# Altium PCB Led Strip 8mm.PcbDoc
Units mm, origin at the board's own origin, x right, y up, seen from the top; angles counter-clockwise.
Board outline 300 x 100 mm, 4 copper layers (Top Layer, Internal Plane 1, Internal Plane 2, Bottom Layer), stack 0.462 mm thick; 52 components, 41 nets, 104 pads, 0 vias.
Unrouted connection lines stored in the file: 21.
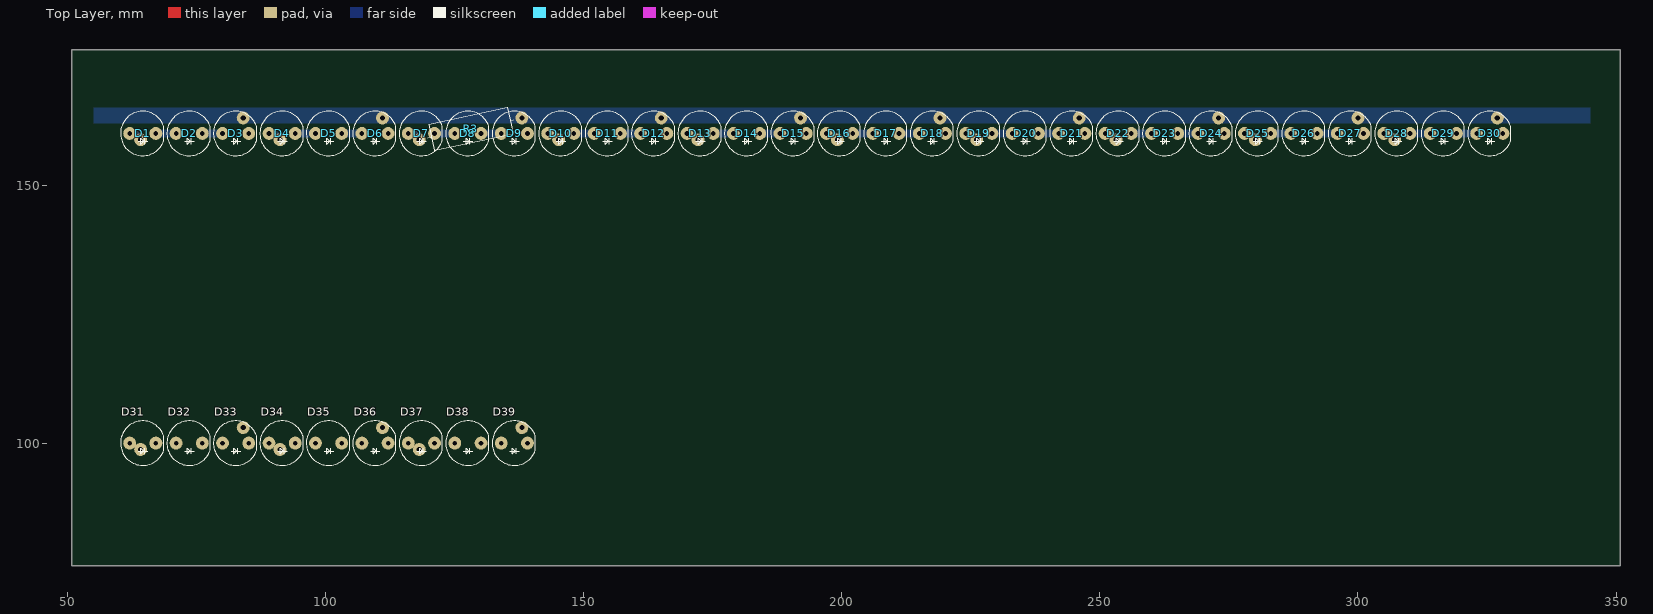
[diagram p0: Top Layer view]
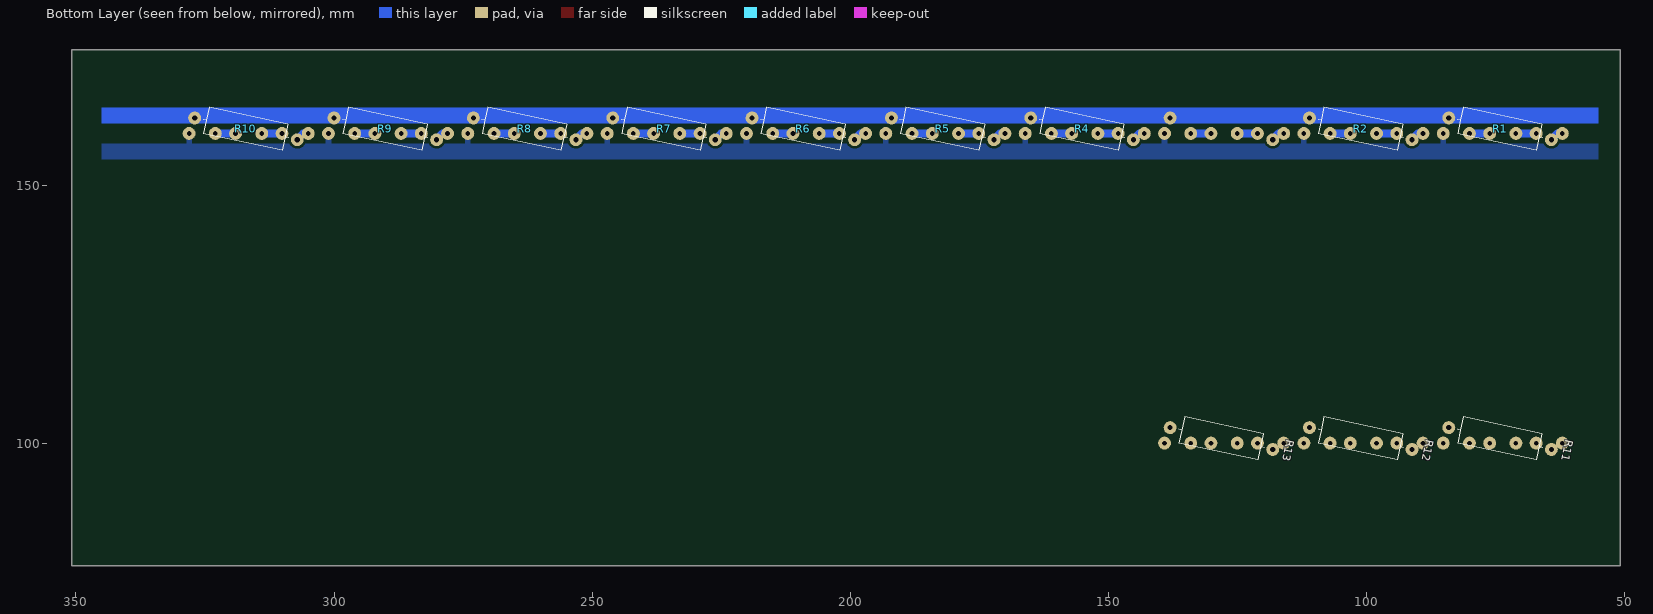
[diagram p1: Bottom Layer view, seen from below]
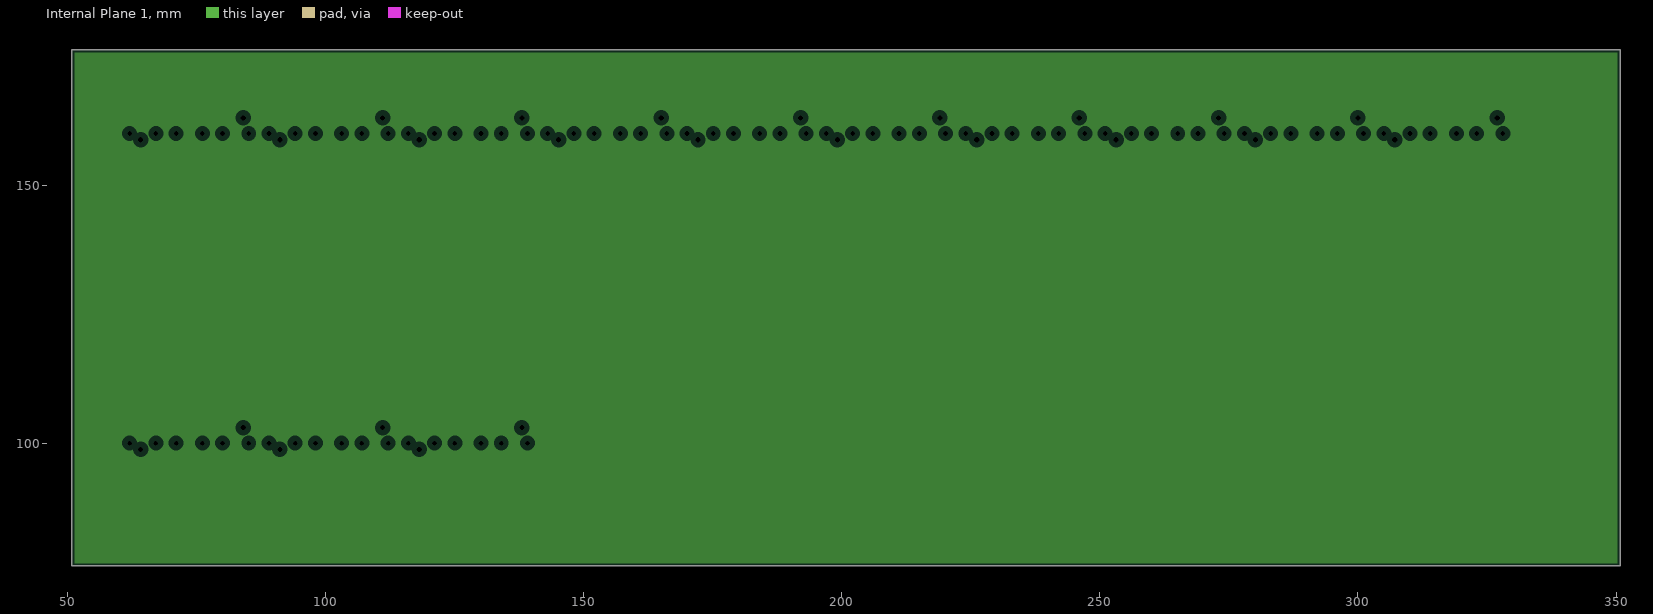
[diagram p2: Internal Plane 1, clearances drawn from the general rule]
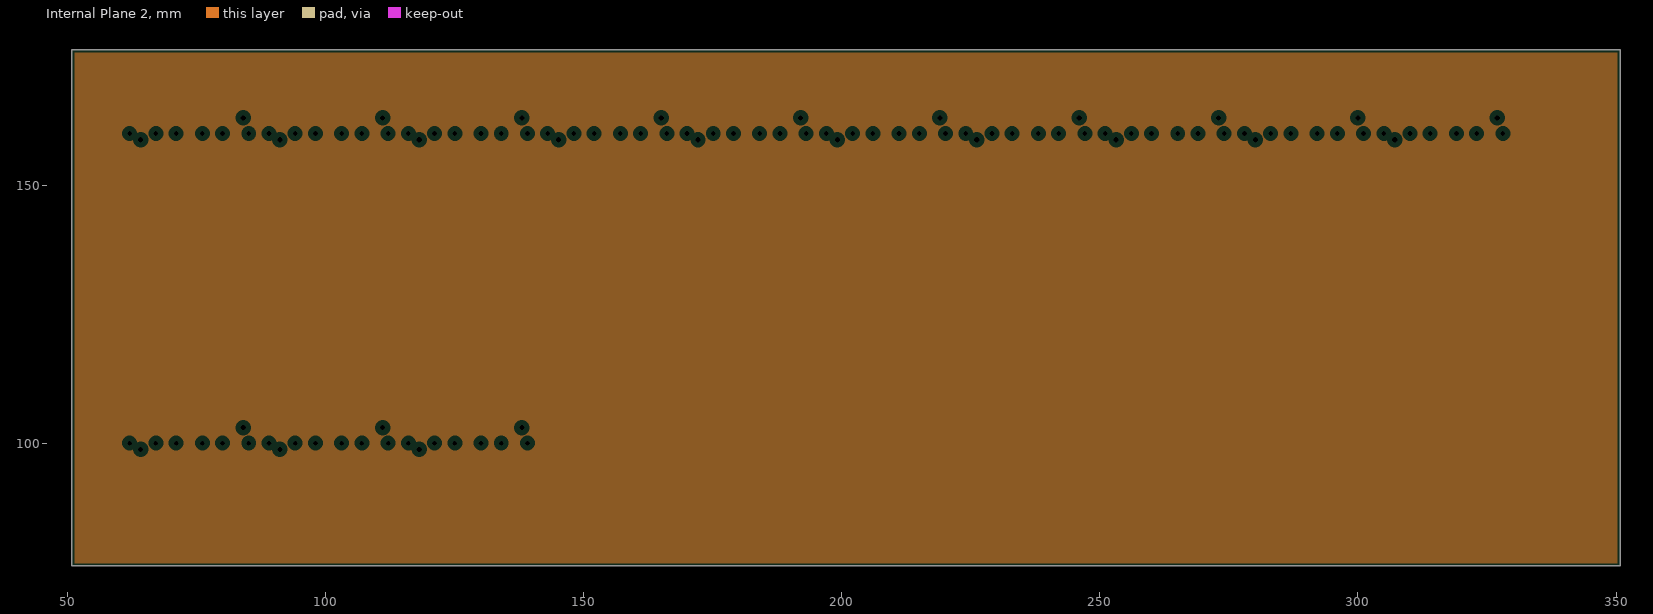
[diagram p3: Internal Plane 2, clearances drawn from the general rule]

## Layer stack, top to bottom
Top Solder: solder mask 0.0102, Solder Resist, Dk 3.5
Top Layer: signal copper 0.0356
Internal Plane 1: plane copper 0.0356
Internal Plane 2: plane copper 0.0356
Dielectric 1: dielectric 0.32, FR-4, Dk 4.8
Bottom Layer: signal copper 0.0356
Bottom Solder: solder mask 0.0102, Solder Resist, Dk 3.5

## Board outline
50.8,76.2 350.8,76.2 350.8,176.2 50.8,176.2

## Design rules (kind name [scope] priority, off if disabled: settings)
Clearance [All] p1: gap=0.5
ComponentClearance [All] p1: gap=0 collisioncheckmode=3 verticalgap=0 showdistances=FALSE
PlaneClearance [All] p1: clearance=1
PlaneConnect [All] p1: planeconnectstyle=Relief reliefexpansion=0.508 reliefentries=4 reliefconductorwidth=1 reliefairgap=1
PolygonConnect [All] p1: connectstyle=Relief reliefconductorwidth=1 reliefentries=4 polygonreliefangle="90 Angle" airgapwidth=0.5
RoutingVias [All] p1: holewidth=0.6 width=1 viastyle="Through Hole" minholewidth=0.711 minwidth=1.27 maxholewidth=0.711 maxwidth=1.27
SolderMaskExpansion [All] p1: expansion=0.102
Width [All] p1: maxlimit=5 minlimit=0.5 preferedwidth=1
26 further rules are at their usual default settings.

## Components (designator, comment, footprint, x,y, rotation, side; value= is the part's Value field where it differs from the comment)
D1 "Yellow" "LED Round 8mm Yellow" 62,160 r0 top
D2 "Yellow" "LED Round 8mm Yellow" 71,160 r0 top
D3 "Yellow" "LED Round 8mm Yellow" 80,160 r0 top
D4 "Yellow" "LED Round 8mm Yellow" 89,160 r0 top
D5 "Yellow" "LED Round 8mm Yellow" 98,160 r0 top
D6 "Yellow" "LED Round 8mm Yellow" 107,160 r0 top
D7 "Yellow" "LED Round 8mm Yellow" 116,160 r0 top
D8 "Yellow" "LED Round 8mm Yellow" 125,160 r0 top
D9 "Yellow" "LED Round 8mm Yellow" 134,160 r0 top
D10 "Yellow" "LED Round 8mm Yellow" 143,160 r0 top
D11 "Yellow" "LED Round 8mm Yellow" 152,160 r0 top
D12 "Yellow" "LED Round 8mm Yellow" 161,160 r0 top
D13 "Yellow" "LED Round 8mm Yellow" 170,160 r0 top
D14 "Yellow" "LED Round 8mm Yellow" 179,160 r0 top
D15 "Yellow" "LED Round 8mm Yellow" 188,160 r0 top
D16 "Yellow" "LED Round 8mm Yellow" 197,160 r0 top
D17 "Yellow" "LED Round 8mm Yellow" 206,160 r0 top
D18 "Yellow" "LED Round 8mm Yellow" 215,160 r0 top
D19 "Yellow" "LED Round 8mm Yellow" 224,160 r0 top
D20 "Yellow" "LED Round 8mm Yellow" 233,160 r0 top
D21 "Yellow" "LED Round 8mm Yellow" 242,160 r0 top
D22 "Yellow" "LED Round 8mm Yellow" 251,160 r0 top
D23 "Yellow" "LED Round 8mm Yellow" 260,160 r0 top
D24 "Yellow" "LED Round 8mm Yellow" 269,160 r0 top
D25 "Yellow" "LED Round 8mm Yellow" 278,160 r0 top
D26 "Yellow" "LED Round 8mm Yellow" 287,160 r0 top
D27 "Yellow" "LED Round 8mm Yellow" 296,160 r0 top
D28 "Yellow" "LED Round 8mm Yellow" 305,160 r0 top
D29 "Yellow" "LED Round 8mm Yellow" 314,160 r0 top
D30 "Yellow" "LED Round 8mm Yellow" 323,160 r0 top
D31 "Yellow" "LED Round 8mm Yellow" 62,100 r0 top
D32 "Yellow" "LED Round 8mm Yellow" 71,100 r0 top
D33 "Yellow" "LED Round 8mm Yellow" 80,100 r0 top
D34 "Yellow" "LED Round 8mm Yellow" 89,100 r0 top
D35 "Yellow" "LED Round 8mm Yellow" 98,100 r0 top
D36 "Yellow" "LED Round 8mm Yellow" 107,100 r0 top
D37 "Yellow" "LED Round 8mm Yellow" 116,100 r0 top
D38 "Yellow" "LED Round 8mm Yellow" 125,100 r0 top
D39 "Yellow" "LED Round 8mm Yellow" 134,100 r0 top
R1 "Om" "Res p20.32 (9p) 2w" 84,163 r192 bottom
R2 "Om" "Res p20.32 (9p) 2w" 111,163 r192 bottom
R3 "Om" "Res p20.32 (9p) 2w" 138,163 r192 top
R4 "Om" "Res p20.32 (9p) 2w" 165,163 r192 bottom
R5 "Om" "Res p20.32 (9p) 2w" 192,163 r192 bottom
R6 "Om" "Res p20.32 (9p) 2w" 219,163 r192 bottom
R7 "Om" "Res p20.32 (9p) 2w" 246,163 r192 bottom
R8 "Om" "Res p20.32 (9p) 2w" 273,163 r192 bottom
R9 "Om" "Res p20.32 (9p) 2w" 300,163 r192 bottom
R10 "Om" "Res p20.32 (9p) 2w" 327,163 r192 bottom
R11 "Om" "Res p20.32 (9p) 2w" 84,103 r192 bottom
R12 "Om" "Res p20.32 (9p) 2w" 111,103 r192 bottom
R13 "Om" "Res p20.32 (9p) 2w" 138,103 r192 bottom

## Footprints (in the part's own frame and the unit in brackets; to place one, negate y for a bottom-side part, rotate by r counter-clockwise, add the part's x,y. Pads: shape width x height; smd on the part's side, far side on the other; paste and mask are expansions set on the pad)
"LED Round 8mm Yellow" [mm]
  round 2.5 hole 0.9: A(0,0) K(5.08,0)
  silkscreen extent -1.77,-4.3 6.6,4.3, body extent -1.85,-4.5 6.68,4.5, height 13
"Res p20.32 (9p) 2w" [mm] "L p20.32; horisontal"
  round 2.5 hole 1: 1(0,0) 2(20.32,0)
  silkscreen extent 1.7,-2.6 18.6,2.6, body extent -0.35,-2.75 20.67,2.75, height 5.5

## Part data
D1 D2 D3 D4 D5 D6 D7 D8 D9 D10 D11 D12 D13 D14 D15 D16 D17 D18 D19 D20 D21 D22 D23 D24 D25 D26 D27 D28 D29 D30 D31 D32 D33 D34 D35 D36 D37 D38 D39: library part "Led Round 8mm Yellow 0.5W", "2.8-3v 25mA, 4-5cd"
R1 R2 R3 R4 R5 R6 R7 R8 R9 R10 R11 R12 R13: library part "Res 2W", "5W Cement"

## Nets (pads, with @x,y where several pads share a name; then routed paths per layer and width w, separated by ;. In a path a pad name is that pad's centre, name@x,y a point inside that pad or via, vN(x,y) a via of type N, cw(c..) or ccw(c..) an arc to the next point about the centre after c; other vN are vias at no path point)
GND: D3.K D6.K D9.K D12.K D15.K D18.K D21.K D24.K D27.K D30.K D33.K D36.K D39.K
NetD1_A: D1.A R1.2 | length 2.4
  Bottom Layer w1.5: D1.A 63,160 R1.2@64,159
NetD1_K: D1.K D2.A | length 3.9
  Bottom Layer w1.5: D1.K D2.A
NetD2_K: D2.K D3.A | length 3.9
  Bottom Layer w1.5: D2.K D3.A
NetD4_A: D4.A R2.2 | length 2.4
  Bottom Layer w1.5: D4.A 90,160 R2.2@91,159
NetD4_K: D4.K D5.A | length 3.9
  Bottom Layer w1.5: D4.K D5.A
NetD5_K: D5.K D6.A | length 3.9
  Bottom Layer w1.5: D5.K D6.A
NetD7_A: D7.A R3.2 | length 2.4
  Bottom Layer w1.5: D7.A 117,160 R3.2@118,159
NetD7_K: D7.K D8.A | length 3.9
  Bottom Layer w1.5: D7.K D8.A
NetD8_K: D8.K D9.A | length 3.9
  Bottom Layer w1.5: D8.K D9.A
NetD10_A: D10.A R4.2 | length 2.4
  Bottom Layer w1.5: D10.A 144,160 R4.2@145,159
NetD10_K: D10.K D11.A | length 3.9
  Bottom Layer w1.5: D10.K D11.A
NetD11_K: D11.K D12.A | length 3.9
  Bottom Layer w1.5: D11.K D12.A
NetD13_A: D13.A R5.2 | length 2.4
  Bottom Layer w1.5: D13.A 171,160 R5.2@172,159
NetD13_K: D13.K D14.A | length 3.9
  Bottom Layer w1.5: D13.K D14.A
NetD14_K: D14.K D15.A | length 3.9
  Bottom Layer w1.5: D14.K D15.A
NetD16_A: D16.A R6.2 | length 2.4
  Bottom Layer w1.5: D16.A 198,160 R6.2@199,159
NetD16_K: D16.K D17.A | length 3.9
  Bottom Layer w1.5: D16.K D17.A
NetD17_K: D17.K D18.A | length 3.9
  Bottom Layer w1.5: D17.K D18.A
NetD19_A: D19.A R7.2 | length 2.4
  Bottom Layer w1.5: D19.A 225,160 R7.2@226,159
NetD19_K: D19.K D20.A | length 3.9
  Bottom Layer w1.5: D19.K D20.A
NetD20_K: D20.K D21.A | length 3.9
  Bottom Layer w1.5: D20.K D21.A
NetD22_A: D22.A R8.2 | length 2.4
  Bottom Layer w1.5: D22.A 252,160 R8.2@253,159
NetD22_K: D22.K D23.A | length 3.9
  Bottom Layer w1.5: D22.K D23.A
NetD23_K: D23.K D24.A | length 3.9
  Bottom Layer w1.5: D23.K D24.A
NetD25_A: D25.A R9.2 | length 2.4
  Bottom Layer w1.5: D25.A 279,160 R9.2@280,159
NetD25_K: D25.K D26.A | length 3.9
  Bottom Layer w1.5: D25.K D26.A
NetD26_K: D26.K D27.A | length 3.9
  Bottom Layer w1.5: D26.K D27.A
NetD28_A: D28.A R10.2 | length 2.4
  Bottom Layer w1.5: D28.A 306,160 R10.2@307,159
NetD28_K: D28.K D29.A | length 3.9
  Bottom Layer w1.5: D28.K D29.A
NetD29_K: D29.K D30.A | length 3.9
  Bottom Layer w1.5: D29.K D30.A
NetD31_A: D31.A R11.2
NetD31_K: D31.K D32.A
NetD32_K: D32.K D33.A
NetD34_A: D34.A R12.2
NetD34_K: D34.K D35.A
NetD35_K: D35.K D36.A
NetD37_A: D37.A R13.2
NetD37_K: D37.K D38.A
NetD38_K: D38.K D39.A
VCC: R1.1 R2.1 R3.1 R4.1 R5.1 R6.1 R7.1 R8.1 R9.1 R10.1 R11.1 R12.1 R13.1

## Polygon pours and split planes (outlines as drawn)
GND on Bottom Layer "Top Layer-No Net" (solid, pour order 4): 55,155 55,158 345,158 345,155

## Other copper
Bottom Layer:
  region net VCC: 55,162 55,165 345,165 345,162